# Allegro board 2019-08-20.brd
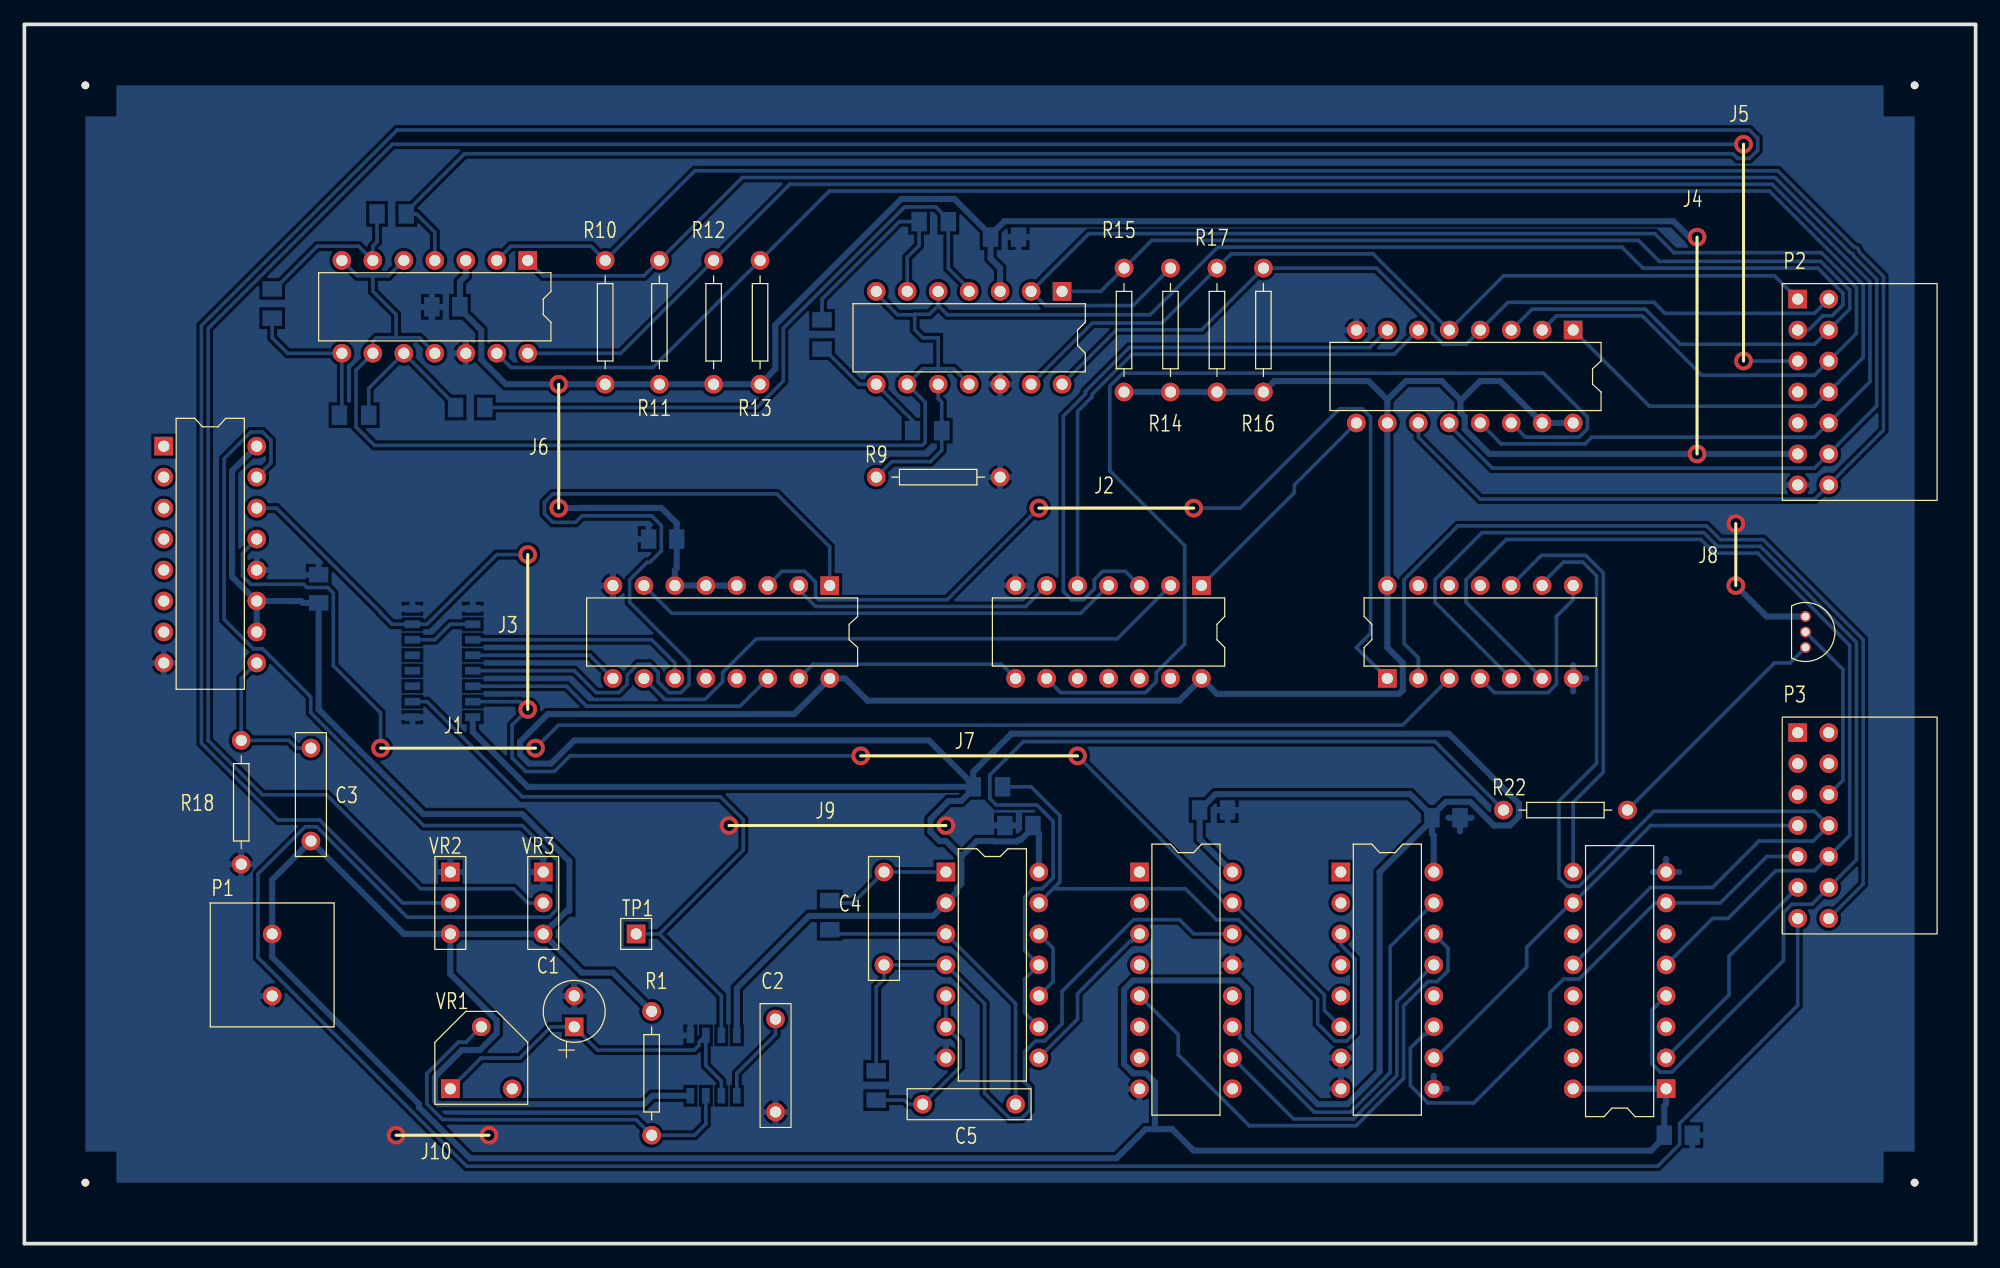
[diagram p0: board, top side]
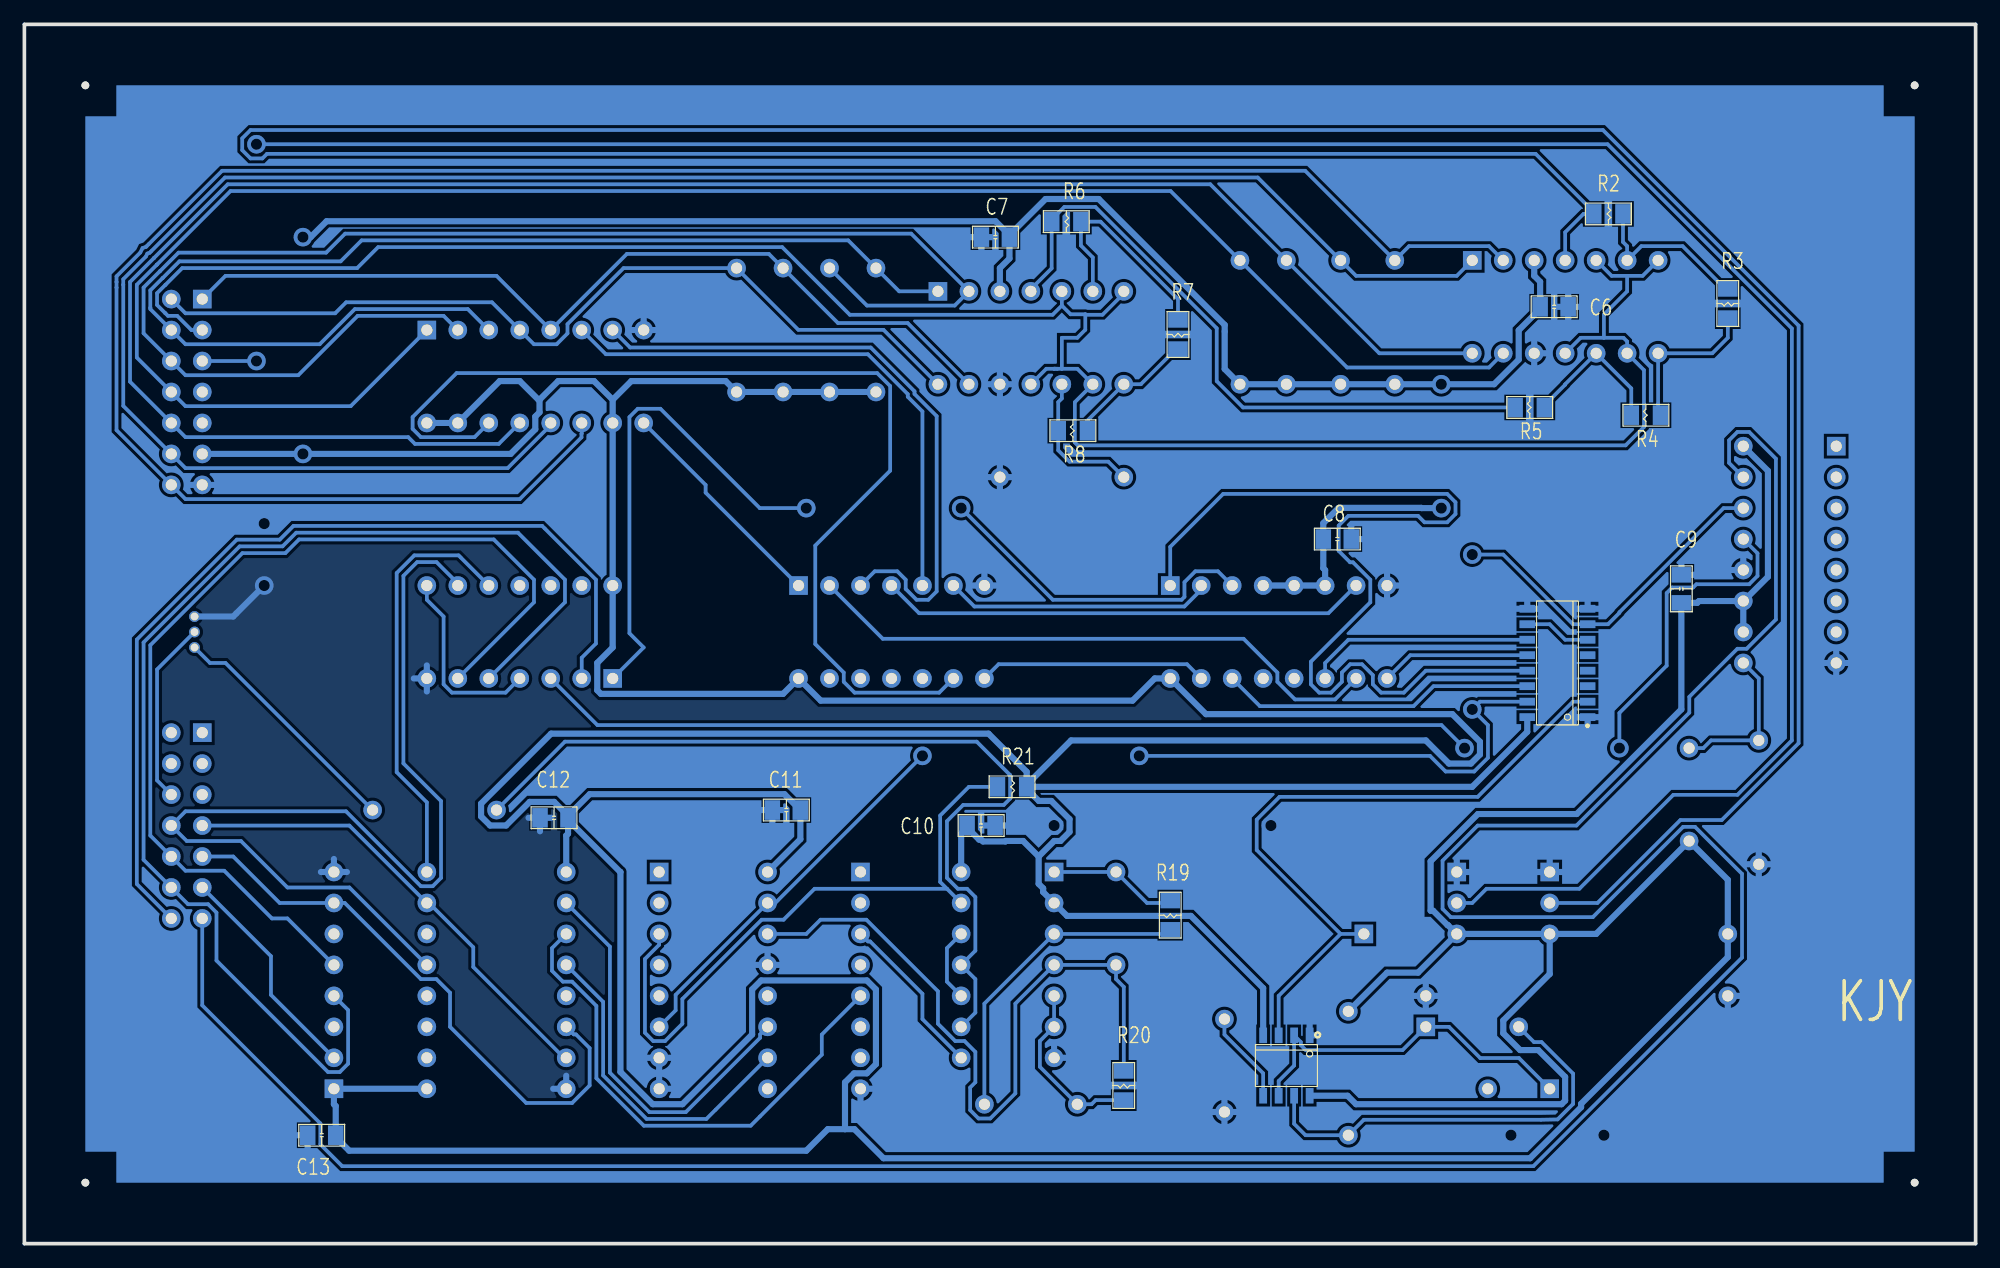
[diagram p1: board, bottom side, seen from below]

Outline 160 x 100 mm; copper layers: TOP, BOTTOM. Coordinates in mm from the lower left corner of the outline.
Outline path: 0,100 0,0 160,0 160,100 0,100

## Design rules (mm)
nets with their own width: min track width 0.3; nets MOTOR-GND
nets with their own width: min track width 0.5; nets +5V GND

## Placement (name value [footprint] x y rotation side)
C1  10uF  [CAP196]  45.09 17.78 0 top
C2  0.1uF  [CAP300]  61.59 18.41 270 top
C3  0.1uF  [CAP300]  23.5 33.02 90 top
C4  0.1uF  [CAP300]  70.48 30.48 270 top
C5  0.1uF  [CAP300]  81.28 11.43 180 top
C6  0.1uF  [SMDCAP]  35.56 76.83 180 bottom
C7  0.1uF  [SMDCAP]  79.38 82.55 0 bottom
C8  0.1uF  [SMDCAP]  53.34 57.78 180 bottom
C9  0.1uF  [SMDCAP]  24.13 52.7 90 bottom
C10  0.1uF  [SMDCAP]  82.55 34.29 180 bottom
C11  0.1uF  [SMDCAP]  96.52 35.56 0 bottom
C12  0.1uF  [SMDCAP]  115.57 34.92 0 bottom
C13  0.1uF  [SMDCAP]  134.62 8.89 0 bottom
J1  -  [44]  41.91 40.64 0 bottom
J2  -  [44]  95.89 60.33 0 bottom
J3  -  [44]  41.27 43.81 270 bottom
J4  -  [66]  137.16 64.77 270 bottom
J5  -  [66]  140.97 72.39 270 bottom
J6  -  [33]  43.81 70.48 90 bottom
J7  -  [66]  86.36 40.01 0 bottom
J8  -  [11]  140.34 53.98 270 bottom
J9  -  [66]  75.56 34.29 0 bottom
J10  -  [22]  30.48 8.89 180 bottom
NOREF  -  [unnamed]  155 5 0 top
NOREF#2  -  [unnamed]  5 5 0 top
NOREF#3  -  [unnamed]  5 95 0 top
NOREF#4  -  [#2]  0 0 0 top
NOREF#5  -  [#2]  0 0 90 top
NOREF#6  -  [unnamed]  155 95 0 top
P1  CON2  [2P]  20.32 25.4 0 top
P2  CON14  [JUMPER14]  145.41 77.47 270 top
P3  CON14  [JUMPER14]  145.41 41.91 270 top
Q1  2SC1815  [TO92]  146.05 51.44 0 top
R1  10K  [RES400]  51.44 19.05 270 top
R2  10K  [SMDR]  31.11 84.45 180 bottom
R3  10K  [SMDR]  20.32 78.11 270 bottom
R4  10K  [SMDR]  26.04 67.94 0 bottom
R5  10K  [SMDR]  35.56 68.58 0 bottom
R6  10K  [SMDR]  75.56 83.82 180 bottom
R7  10K  [SMDR]  65.41 75.56 270 bottom
R8  10K  [SMDR]  73.03 66.67 0 bottom
R9  10K  [RES400]  69.85 62.87 0 top
R10  10K  [RES400]  47.62 70.48 90 top
R11  10K  [RES400]  52.07 70.48 90 top
R12  10K  [RES400]  56.52 70.48 90 top
R13  10K  [RES400]  60.33 70.48 90 top
R14  10K  [RES400]  93.98 69.85 90 top
R15  10K  [RES400]  90.17 69.85 90 top
R16  10K  [RES400]  101.6 69.85 90 top
R17  10K  [RES400]  97.79 69.85 90 top
R18  10K  [RES400]  17.78 41.27 270 top
R19  10K  [SMDR]  66.04 27.94 270 bottom
R20  10K  [SMDR]  69.85 13.97 270 bottom
R21  10K  [SMDR]  80.01 37.47 180 bottom
R22  10K  [RES400]  121.28 35.56 0 top
TP1  TP  [JUMPER1]  50.16 25.4 0 top
U1  NE555  [SOIC8]  56.52 14.61 270 bottom
U2  LM339  [DIP14_3]  41.27 80.64 270 top
U3  LM339  [DIP14_3]  85.09 78.11 270 top
U4  40147  [DIP16_3]  127 74.93 270 top
U5  4069  [DIP14_3]  96.52 53.98 270 top
U6  4518  [SOIC16]  34.29 47.62 0 bottom
U7  4585  [DIP16_3]  66.04 53.98 270 top
U8  4027  [DIP16_3]  11.43 65.41 0 top
U9  4071  [DIP14_3]  111.76 46.35 90 top
U10  4001  [DIP14_3]  75.56 30.48 0 top
U11  4017  [DIP16_3]  91.44 30.48 0 top
U12  4051  [DIP16_3]  107.95 30.48 0 top
U13  4175  [DIP16_3]  134.62 12.7 180 top
VR1  1M  [VR1]  34.92 12.7 0 top
VR2  10K  [VR2]  34.92 27.94 0 top
VR3  10K  [VR2]  42.55 27.94 0 top

## Library data of the parts
C1 = Cap POL
C2-C5 = Cap NP
C6-C13 = Cap TEXT
J1-J10 = JUMPER
P1 = CON2
P2 P3 = CON14
Q1 = 2SC1815
R1-R22 = resistor
TP1 = TP
U1 = NE555: Tolerance: ***; User Part Number: ***
U2 U3 = LM339: Tolerance: ***; User Part Number: ***
U4 = 40147: Tolerance: ***; User Part Number: ***
U5 = 4069: Tolerance: ***; User Part Number: ***
U6 = 4518: Tolerance: ***; User Part Number: ***
U7 = 4585: Tolerance: ***; User Part Number: ***
U8 = 4027: Tolerance: ***; User Part Number: ***
U9 = 4071: Tolerance: ***; User Part Number: ***
U10 = 4001: Tolerance: ***; User Part Number: ***
U11 = 4017: Tolerance: ***; User Part Number: ***
U12 = 4051: Tolerance: ***; User Part Number: ***
U13 = 4175: Tolerance: ***; User Part Number: ***
VR1 = VR1
VR2 VR3 = VR2

## Footprints (pads in the part's own frame, mm; a bottom-side part is the same pattern mirrored in y, then rotated)
2P
  round 1.524 hole 0.914: 1(0,0) 2(0,-5.08)
CAP196
  rect 1.524x1.524 hole 0.914: 1(0,0)
  round 1.524 hole 0.914: 2(0,2.54)
CAP300
  round 1.524 hole 0.914: 1(0,0) 2(7.62,0)
DIP14_3
  rect 1.524x1.524 hole 0.914: 1(0,0)
  round 1.524 hole 0.914: 2(0,-2.54) 3(0,-5.08) 4(0,-7.62) 5(0,-10.16) 6(0,-12.7) 7(0,-15.24) 8(7.62,-15.24) 9(7.62,-12.7) 10(7.62,-10.16) 11(7.62,-7.62) 12(7.62,-5.08) 13(7.62,-2.54) 14(7.62,0)
DIP16_3
  rect 1.524x1.524 hole 0.914: 1(0,0)
  round 1.524 hole 0.914: 2(0,-2.54) 3(0,-5.08) 4(0,-7.62) 5(0,-10.16) 6(0,-12.7) 7(0,-15.24) 8(0,-17.78) 9(7.62,-17.78) 10(7.62,-15.24) 11(7.62,-12.7) 12(7.62,-10.16) 13(7.62,-7.62) 14(7.62,-5.08) 15(7.62,-2.54) 16(7.62,0)
JUMPER1
  rect 1.524x1.524 hole 0.914: 1(0,0)
JUMPER14
  rect 1.524x1.524 hole 0.914: 1(0,0)
  round 1.524 hole 0.914: 2(0,2.54) 3(2.54,0) 4(2.54,2.54) 5(5.08,0) 6(5.08,2.54) 7(7.62,0) 8(7.62,2.54) 9(10.16,0) 10(10.16,2.54) 11(12.7,0) 12(12.7,2.54) 13(15.24,0) 14(15.24,2.54)
RES400
  round 1.524 hole 0.914: 1(0,0) 2(10.16,0)
SMDCAP
  rect 1.27x1.6 smd: 1(-0.15,0) 2(2.15,0)
SMDR
  rect 1.27x1.6 smd: 1(-0.2,0) 2(2.2,0)
SOIC8
  rect 1.27x0.635 smd: 1(-2.476,1.905) 2(-2.476,0.635) 3(-2.476,-0.635) 4(-2.476,-1.905) 5(2.476,-1.905) 6(2.476,-0.635) 7(2.476,0.635) 8(2.476,1.905)
SOIC16
  rect 1.27x0.635 smd: 1(-2.476,4.445) 2(-2.476,3.175) 3(-2.476,1.905) 4(-2.476,0.635) 5(-2.476,-0.635) 6(-2.476,-1.905) 7(-2.476,-3.175) 8(-2.476,-4.445) 9(2.476,-4.445) 10(2.476,-3.175) 11(2.476,-1.905) 12(2.476,-0.635) 13(2.476,0.635) 14(2.476,1.905) 15(2.476,3.175) 16(2.476,4.445)
TO92
  round 0.889 hole 0.635: 1(0,0) 2(0,-1.27) 3(0,-2.54)
unnamed
  round 0.635 hole 3.175 unplated: (0,0)
VR1
  rect 1.524x1.524 hole 0.914: 1(0,0)
  round 1.524 hole 0.914: 2(2.54,5.08) 3(5.08,0)
VR2
  round 1.524 hole 0.914: 1(0,-2.54) 2(0,0)
  rect 1.524x1.524 hole 0.914: 3(0,2.54)

## Nets
+5V: C3.1 C6.1 C7.1 C8.1 C9.1 C10.1 C11.1 C12.1 C13.1 P1.1 P2.11 R1.1 R10.1 R11.1 R12.1 R13.1 R14.1 R15.1 R16.1 R17.1 R21.2 U1.4(RST) U1.8(VCC) U2.3 U3.3 U4.10(I\9\) U4.15(I\0\) U4.16(VCC) U5.14 U6.16 U7.4(A>BIN) U7.5(A<BIN) U7.6(A=BIN) U7.16(VCC) U8.10(J) U8.11(K) U8.16 U9.14 U10.2(I1) U10.14 U11.16(VCC) U12.16(VCC) U13.1(R\S\T\) U13.16(VCC) VR2.1(A) VR3.1(A)
GND: C1.2 C2.2 C6.2 C7.2 C8.2 C9.2 C10.2 C11.2 C12.2 C13.2 P1.2 P2.13 Q1.1(B) R9.2 R18.2 U1.1(GND) U2.12 U3.12 U4.8(GND) U5.7 U6.1(CLK) U6.8 U6.9(CLK) U7.8(GND) U8.8 U8.12(RST) U9.7 U10.7 U11.8(GND) U11.13(C\K\E\N\) U12.7(VEE) U12.8(GND) U12.9(C) U13.8(GND) VR2.3(WIPER) VR3.3(WIPER)
ADC0: P2.14 R10.2 U2.2(OUT) U4.11(I\1\)
ADC1: P2.12 R11.2 U2.1(OUT) U4.12(I\2\)
ADC2: P2.10 R12.2 U2.14(OUT) U4.13(I\3\)
ADC3: P2.8 R13.2 U2.13(OUT) U4.1(I\4\)
ADC4: P2.6 R14.2 U3.2(OUT) U4.2(I\5\)
ADC5: P2.4 R15.2 U3.1(OUT) U4.3(I\6\)
ADC6: P2.2 R16.2 U3.14(OUT) U4.4(I\7\)
ADC7: P2.1 R17.2 U3.13(OUT) U4.5(I\8\)
CLK: TP1.1 U1.3(OUT) U6.2(EN)
MOTOR-GND: P3.6 Q1.2(C)
MR: U6.7(CLR) U6.15(CLR) U8.14(Q\) U11.15(RST) U12.6(E\N\)
MR2: P3.13 U8.15(Q)
SW1: P3.14 U9.2(I1)
SW2: P3.12 U9.5(I0) U13.4(D0)
SW3: P3.10 U9.6(I1) U13.5(D1)
SW4: P3.8 U9.9(I1) U13.12(D2)
SWLED1: P3.11 U13.2(Q0)
SWLED2: P3.9 U12.11(A) U13.7(Q1)
SWLED3: P3.7 U12.10(B) U13.10(Q2)
VR3: P2.5 VR3.2(B)
VR-LED: P2.3 U2.5(+IN) U2.7(+IN) U2.9(+IN) U2.11(+IN) U3.5(+IN) U3.7(+IN) U3.9(+IN) U3.11(+IN)
N00183: R2.1 U2.4(-IN) VR2.2(B)
N00203: R2.2 R3.1 U2.6(-IN)
N00569: R3.2 R4.1 U2.8(-IN)
N00644: R4.2 R5.1 U2.10(-IN)
N00726: R5.2 R6.1 U3.4(-IN)
N00801: R6.2 R7.1 U3.6(-IN)
N00876: R7.2 R8.1 U3.8(-IN)
N00951: R8.2 R9.1 U3.10(-IN)
N03223: U4.9(A\) U5.1(I)
N03253: U4.7(B\) U5.3(I)
N03265: U4.6(C\) U5.5(I)
N03278: U4.14(D\) U5.9(I)
N03294: U5.2(O) U7.10(A0)
N03330: U5.4(O) U7.7(A1)
N03646: U5.6(O) U7.2(A2)
N03660: U5.8(O) U7.15(A3)
N03717: U6.11(Q0) U7.11(B0)
N03719: U6.12(Q1) U7.9(B1)
N03721: U6.13(Q2) U7.1(B2)
N03723: U6.14(Q3) U7.14(B3)
N03908: U6.6(Q3) U6.10(EN)
N04070: U7.3(A=BOUT) U9.1(I0)
N04109: U8.13(CLK) U9.3(O)
N04217: C1.1 U1.2(TRIG) U1.6(THR) VR1.1
N04252: R1.2 U1.7(DISC) VR1.2
N04333: C2.1 U1.5(CV)
N04384: C3.2 R18.1 U8.9(SET)
N08382: C5.1 R19.2 U10.3(O)
N08397: C5.2 R20.2 U10.5(I0) U10.6(I1)
N08458: C4.2 R20.1 U10.4(O) U11.14(CLK)
N08462: C4.1 R19.1 U10.1(I0)
N09234: U10.8(I0) U11.3(0)
N09252: U11.10(4) U12.13(X0)
N09264: U11.5(6) U12.14(X1)
N09282: U11.11(9) U12.15(X2)
N09536: U9.4(O) U9.8(I0)
N09552: U9.10(O) U13.9(CLK)
N09939: Q1.3(E) R22.2
N09960: R22.1 U10.9(I1) U10.11(O)
N09972: U10.10(O) U10.12(I0)
N10089: R21.1 U10.13(I1) U12.3(X)

Pads without a net: P2 7 9; P3 1 2 3 4 5; U5 10 11 12 13; U6 3 4 5; U7 12 13; U8 1 2 3 4 5 6 7; U9 11 12 13; U11 1 2 4 6 7 9 12; U12 1 2 4 5 12; U13 3 6 11 13 14 15; VR1 3

## Via types
v1: diameter 1.524, hole 0.914, TOP to BOTTOM, 20 vias

## Routing (per net, layer and track width the routed paths; a pad name or vN(x,y) marks a point on that pad's centre or on a via; arc(x,y) is an arc through that point)
+5V: length 889.3
  BOTTOM w0.5: U4.16 U4.15 121.02,70.75 119.38,70.75 117.85,69.22 117.76,69.22 ; 111.76,69.22 110.23,70.75 102.5,70.75 R16.1 R17.1 R14.1 R15.1 ; 111.76,69.22 U4.10 111.76,48.9 113.03,47.63 113.03,45.38 112.73,45.09 97.79,45.09 U5.14 94.7,44.53 69.13,44.53 67.31,46.35 U7.16 63.11,43.43 42.91,43.43 40.64,41.16 40.64,40.12 41.38,39.37 43.18,39.37 45.08,41.27 74.17,41.27 77.81,37.63 ; 111.76,69.22 113.29,70.75 116.23,70.75 117.76,69.22 ; 92.71,9.39 94.12,9.39 95.89,7.62 133.37,7.62 134.47,8.72 C13.1 134.47,11.28 134.62,11.43 U13.1 U13.16 ; 92.71,9.39 91.94,9.39 89.55,7 36.53,7 32.35,11.19 32.35,11.46 20.32,23.5 P1.1 20.32,29.84 C3.1 31.11,25.4 VR2.1 ; 92.71,9.39 92.71,13.22 91.97,13.97 90.92,13.97 90.17,14.71 90.17,20.84 90.92,21.59 99.58,21.59 100.33,20.84 100.33,17.15 106.04,11.43 108.47,11.43 111.12,14.08 111.12,30.48 111.14,30.48 115.42,34.76 ; U8.16 17.03,63.38 17.03,54.69 19.02,52.7 U8.11 ; U8.11 22.68,52.7 22.83,52.55 C9.1 24.13,43.82 32.71,35.23 40.81,35.23 44.69,31.36 44.69,27.3 44.48,27.3 43.3,26.12 43.27,26.12 VR3.1 ; U8.11 U8.10 ; U12.16 115.57,33.47 115.42,33.62 115.42,34.76 ; VR2.1 VR3.1 ; VR2.1 34.92,22.11 38.73,18.3 38.73,17.25 37.35,15.88 35.86,15.88 33.66,13.67 33.66,11.73 33.95,11.43 50.8,11.43 51.5,12.13 54.61,12.13 ; VR3.1 45.72,22.23 48.26,22.23 R1.1 ; U1.4 58.42,20.95 64.34,26.88 74.5,26.88 U10.2 76.46,28.84 76.46,29.14 76.83,29.51 76.83,31.75 ; 77.81,37.63 77.81,38.7 80.94,41.83 116.81,41.83 122.55,36.09 122.55,35.03 121.81,34.29 120.5,34.29 118.56,36.23 116.56,36.23 115.42,35.09 ; 77.81,37.63 R21.2 ; 76.83,31.75 75.56,33.02 75.04,33.02 74.3,33.77 74.3,34.81 75.79,36.31 76.82,36.31 77.81,37.3 R21.2 ; 76.83,31.75 78.11,33.02 79.52,33.02 79.56,32.99 81.4,32.99 81.54,33.13 81.71,33.13 82.7,34.12 ; U10.14 83.19,33.64 82.7,34.12 ; 117.76,69.22 117.76,68.18 118.11,67.83 118.11,66.79 120.13,64.77 v1(137.16,64.77) P2.11 ; U3.3 80.01,80.01 79.22,80.8 C7.1 79.22,82.72 ; 82.7,34.12 C10.1 ; 79.22,82.72 80.36,83.85 135.22,83.85 136.53,82.55 v1(137.16,82.55) ; 79.22,82.72 76.26,85.68 71.9,85.68 61.58,75.35 61.58,74.81 61.58,71.74 R13.1 R12.1 R11.1 R10.1 v1(43.81,70.48) 39.48,70.48 37.47,72.5 37.47,74.92 35.71,76.67 C6.1 35.71,78.89 36.2,79.38 U2.3 ; R21.2 41.27,37.47 36.77,41.97 U6.16 ; 115.42,34.76 C12.1 115.42,35.09 ; U7.4 U7.5 U7.6 53.34,55.24 53.49,55.39 C8.1 53.49,59.09 52.23,60.34 45.45,60.34 45.43,60.33 v1(43.81,60.33) ; 115.42,35.09 113.65,36.86 97.67,36.86 C11.1 96.37,33.17 U11.16
GND: length 109.7
  BOTTOM w0.5: 107.95,13.77 U12.8 106.88,12.7 ; 61.59,10.79 61.59,11.86 ; 61.59,10.79 62.66,10.79 ; 61.59,10.79 61.59,9.73 ; 61.59,10.79 60.53,10.79 ; v1(140.34,53.98) 142.88,51.44 Q1.1 ; 127,45.29 U9.7 ; U9.7 127,47.42 ; U9.7 128.07,46.35 ; U6.8 32.76,52.07 ; U6.8 31.81,52.7 ; U6.8 30.87,52.07 ; U7.8 48.26,55.04 ; U7.8 47.19,53.98 ; U7.8 48.26,52.91 ; 42.55,29.41 VR3.3 ; VR3.3 42.55,31.55 ; VR3.3 41.48,30.48 ; 137.71,8.89 C13.2 136.77,7.78 ; U2.12 36.2,74.09 ; U2.12 36.2,71.96 ; U2.12 35.13,73.03 ; 90.37,12.7 U11.8 91.44,11.63 ; 17.78,30.05 R18.2 ; R18.2 17.78,32.18 ; R18.2 16.71,31.11 ; R18.2 18.85,31.11 ; 44.02,20.32 C1.2 ; C1.2 45.09,21.39 ; C1.2 46.15,20.32 ; C1.2 45.09,19.25 ; 106.88,15.24 U12.7 ; U12.7 107.95,14.17 ; U12.7 109.02,15.24 ; U13.8 135.69,30.48 ; U13.8 134.62,31.55 ; U13.8 133.55,30.48 ; 54.61,18.02 U1.1 53.98,17.08 ; 81.53,81.44 C7.2 ; C7.2 82.47,82.55 ; C7.2 80.58,82.55 ; 78.94,70.48 U3.12 ; U3.12 81.08,70.48 ; U3.12 80.01,71.55 ; U3.12 80.01,69.42 ; C6.2 34.35,76.83 ; C6.2 33.41,77.94 ; C6.2 33.41,75.73 ; C6.2 32.47,76.83 ; 98.67,34.45 C11.2 ; C11.2 99.61,35.56 ; C11.2 97.73,35.56 ; 97.99,22.86 U11.13 ; U11.13 99.06,23.93 ; U11.13 100.13,22.86 ; 33.86,30.48 VR2.3 ; VR2.3 35.99,30.48 ; VR2.3 34.92,31.55 ; 146.48,62.23 P2.13 144.35,62.23 ; 23.02,54.85 C9.2 24.13,55.8 ; 11.43,46.56 U8.8 ; U8.8 11.43,48.69 ; U8.8 10.36,47.62 ; U8.8 12.5,47.62 ; 80.21,53.98 U5.7 ; U5.7 82.35,53.98 ; U5.7 81.28,55.04 ; 35.82,52.07 U6.9 ; U6.9 36.77,52.7 ; U6.9 37.71,52.07 ; U6.1 32.76,43.18 ; U6.1 30.87,43.18 ; U6.1 31.81,42.55 ; 74.5,15.24 U10.7 75.56,16.31 ; 117.72,33.82 C12.2 ; C12.2 116.78,34.92 ; C12.2 118.66,34.92 ; 80.01,61.8 R9.2 ; R9.2 81.08,62.87 ; R9.2 80.01,63.93 ; R9.2 78.94,62.87 ; 108.15,74.93 U4.8 ; U4.8 110.29,74.93 ; U4.8 109.22,76 ; 115.57,13.77 U12.9 116.64,12.7 ; 81.34,34.29 C10.2 79.46,34.29 ; 19.25,20.32 P1.2 20.32,19.25 ; 19.05,56.31 19.05,55.24 20.12,55.24 ; 50.25,57.78 C8.2 51.19,58.89
  vias: v1(30.48,8.89) v1(38.1,8.89) v1(57.78,34.29) v1(75.56,34.29) v1(140.34,59.05)
ADC0: length 177.7
  BOTTOM w0.3: U4.11 114.3,66.44 114.32,66.42 114.32,66.12 119.38,61.06 146.79,61.06 152.44,66.72 152.44,78.41 152.45,78.42 152.45,78.87 152.45,78.87 152.45,79.33 150.5,81.28 150.31,81.66 150.03,81.75 149.98,81.8 149.82,81.96 143.78,87.99 54.97,87.99 R10.2 46.46,81.81 39.9,81.81 U2.2
ADC1: length 167.2
  BOTTOM w0.3: U4.12 116.84,67.13 120.37,63.6 146.79,63.6 151.89,68.71 151.89,78.64 151.89,79.1 150.04,80.95 149.92,81.2 149.73,81.27 149.59,81.41 143.55,87.44 58.87,87.44 R11.2 50.8,79.38 42.55,79.38 U2.1
ADC2: length 162.1
  BOTTOM w0.3: U2.14 48.9,73.03 R12.2 62.76,86.89 143.32,86.89 149.36,80.85 151.34,78.87 151.34,70.69 146.79,66.14 128.52,66.14 127.97,65.59 121.1,65.59 U4.13
ADC3: length 155.7
  BOTTOM w0.3: U2.13 39.9,71.86 51.54,71.86 R13.2 66.01,86.33 143.09,86.33 149.13,80.3 149.13,80.3 150.78,78.64 150.78,72.68 146.79,68.68 133.25,68.68 U4.1
ADC4: length 118.1
  BOTTOM w0.3: R14.2 90.91,76.94 83.72,76.94 U3.2 87.28,82.84 133.7,82.84 135.25,81.28 147.36,81.28 148.89,79.74 148.9,79.74 150.23,78.41 150.23,74.66 146.79,71.22 137.54,71.22 132.67,76.1 125.63,76.1 U4.2
ADC5: length 100.4
  BOTTOM w0.3: U4.3 123.64,76.65 132.9,76.65 135.79,73.76 146.79,73.76 149.67,76.64 149.67,76.75 149.68,76.76 149.68,78.18 148.67,79.19 148.66,79.19 147.29,80.56 134.07,80.56 132.35,82.28 92.44,82.28 R15.2 88.27,78.11 U3.1
ADC6: length 72.1
  BOTTOM w0.3: U3.14 89.55,74.95 96.54,74.95 R16.2 110.87,80.01 115.47,75.41 115.47,74.66 116.36,73.76 118.21,73.76 U4.4 121.65,77.2 133.62,77.2 134.52,76.3 146.79,76.3 147.96,77.47
ADC7: length 72.5
  BOTTOM w0.3: U3.13 87.57,75.5 93.28,75.5 R17.2 98.96,81.18 110.59,81.18 U4.5 121.28,79.38 143.51,79.38 P2.1
CLK: length 55.7
  BOTTOM w0.3: U1.3 57.15,20.32 52.07,25.4 ; 52.07,25.4 58.95,32.28 58.95,34.77 57.08,36.64 40.83,36.64 33.02,44.45 U6.2 ; 52.07,25.4 TP1.1
MOTOR-GND: length 15.1
  BOTTOM w0.3: Q1.2 149.12,47.09 149.12,38 147.96,36.83
MR: length 99
  BOTTOM w0.3: U8.14 20.67,60.33 29.21,51.78 29.21,51.73 30.14,50.8 U6.7 33.02,50.8 38.73,56.52 v1(41.27,56.52) ; U12.6 106.6,19.13 106.6,20.4 U11.15 98.42,27.94 v1(86.36,40.01) ; U6.15 40.64,44.45 v1(41.27,43.81) 39.99,42.53 39.99,39.84 41.11,38.72 43.45,38.72 44.74,40.01 v1(68.58,40.01)
MR2: length 245.3
  BOTTOM w0.3: P3.13 145.41,19.54 135.73,9.86 135.73,8.14 133.94,6.35 36.26,6.35 19.15,23.46 19.15,30.33 23.01,34.19 23.98,34.19 31.39,26.77 43.03,26.77 43.71,27.46 43.71,31.41 40.83,34.29 32.73,34.29 23.48,43.55 23.48,44.85 19.53,48.79 18.77,48.79 16.38,51.19 16.38,64.38 18.57,66.57 19.53,66.57 20.22,65.89 20.22,64.03 U8.15
SW1: length 76
  BOTTOM w0.3: 147.96,26.67 150.78,29.5 150.78,49.54 142.58,57.74 139.06,57.74 137.94,58.87 117.54,58.87 117.33,58.65 113.13,54.46 113.13,49.22 114.3,48.05 U9.2
SW2: length 101
  BOTTOM w0.3: U9.5 115.67,52.6 115.67,54.46 119.53,58.31 137.71,58.31 138.83,57.19 142.35,57.19 150.23,49.31 150.23,31.48 146.58,27.84 144.93,27.84 144.25,27.15 144.25,23.22 135.1,14.07 134.14,14.07 133.45,14.76 133.45,19.15 U13.4
SW3: length 82.2
  BOTTOM w0.3: U9.6 118.21,52.6 118.21,54.46 121.51,57.76 137.48,57.76 138.6,56.63 142.12,56.63 149.68,49.08 149.68,33.47 146.79,30.58 143.61,30.58 139.7,26.67 138.43,26.67 U13.5
SW4: length 83
  BOTTOM w0.3: U13.12 133.35,29.21 138.43,29.21 142.24,33.02 146.69,33.02 147.96,34.29 146.79,35.46 133.63,35.46 127.48,29.31 126.52,29.31 125.83,30 125.83,36.3 128.92,39.38 128.92,54.77 127.8,55.9 126.2,55.9 124.46,54.15 124.46,53.98
SWLED1: length 18.4
  BOTTOM w0.3: P3.11 139.78,23.58 139.78,20.4 U13.2
SWLED2: length 48.1
  BOTTOM w0.3: P3.9 142.88,31.75 139.06,27.94 U13.7 133.73,27.94 127.48,21.69 126.21,21.69 125.09,20.58 125.09,17.78 118.85,11.53 115.09,11.53 113.65,12.97 113.65,16.04 114.77,17.16 114.95,17.16 U12.11
SWLED3: length 38.7
  BOTTOM w0.3: P3.7 133.35,34.29 U13.10 126.82,27.94 123.19,24.31 123.19,22.68 115.75,15.24 U12.10
VR3: length 203.4
  BOTTOM w0.3: P2.5 v1(140.97,72.39) ; VR3.2 41.27,27.94 40.11,29.11 32.49,29.11 24.78,36.81 19.53,36.81 15.07,41.27 15.07,75.06 30.18,90.17 v1(140.97,90.17)
VR-LED: length 181.8
  BOTTOM w0.3: 74.93,76.94 75.68,76.19 92.31,76.19 97.86,81.73 131,81.73 132.72,80.01 147.06,80.01 148.43,78.64 148.44,78.64 149.12,77.95 149.12,76.99 148.44,76.3 148.44,76.3 148.23,76.1 147.47,76.1 146.31,74.93 P2.3 ; 74.93,76.94 U3.5 ; 74.93,76.94 74.21,76.22 73,76.22 ; 75.31,71.75 74.93,71.75 ; 75.31,71.75 75.56,71.75 ; 75.31,71.75 75.56,71.76 75.56,71.75 ; 74.93,71.75 73.66,71.75 U3.9 73.86,69.01 73.86,65.71 73.63,65.47 28.7,65.47 27.2,66.98 27.2,71.65 U2.9 28.57,74 28.88,74.3 30.48,74.3 ; 74.93,71.75 74.93,74.3 73.66,74.3 73,74.95 73,76.22 ; 28.57,79.38 29.84,79.38 U2.5 ; 28.57,79.38 28.57,78.11 30.48,76.2 30.48,74.3 ; 28.57,79.38 27.3,79.38 26.04,80.64 ; 73,76.22 72.97,76.19 71.59,76.19 69.85,77.93 U3.7 ; U3.11 76.2,71.75 75.56,71.75 ; U2.11 32.38,74.3 30.48,74.3
N00183: length 314.5
  BOTTOM w0.3: VR2.2 31.01,27.94 24.21,34.74 20.82,34.74 14.51,41.04 14.51,75.29 30.56,91.34 141.45,91.34 142.14,90.65 142.14,89.69 141.45,89 140.49,89 140.11,89.38 36.08,89.38 31.32,84.62 31.32,84.45 ; 31.32,84.45 31.11,84.45 ; 31.32,84.45 32.15,84.45 33.66,82.95 U2.4
N00203: length 14.4
  BOTTOM w0.3: R2.2 28.91,82.15 28.57,81.81 U2.6 27.41,81.81 24.03,81.81 20.52,78.31 ; R3.1 20.52,78.31 ; 20.52,78.31 20.32,78.11
N00569: length 13.3
  BOTTOM w0.3: 20.32,76.11 R3.2 20.32,74.3 21.59,73.03 26.04,73.03 26.04,67.94 R4.1
N00644: length 12.7
  BOTTOM w0.3: 28.04,67.94 R4.2 28.23,70.14 U2.10 33.66,70.48 33.66,70.45 35.36,68.75 R5.1
N00726: length 54.4
  BOTTOM w0.3: R5.2 60.07,68.58 62.23,70.74 62.23,75.08 72.17,85.02 74.73,85.02 75.77,83.98 R6.1 75.77,79.99 77.47,78.28 U3.4
N00801: length 18.6
  BOTTOM w0.3: 65.41,75.56 R7.1 65.41,77.47 71.75,83.82 R6.2 73.36,81.86 72.39,80.89 U3.6
N00876: length 10.7
  BOTTOM w0.3: R8.1 72.83,67.51 U3.8 68.45,70.48 65.57,73.36 R7.2
N00951: length 11.8
  BOTTOM w0.3: U3.10 74.93,69.32 75.22,69.02 75.22,65.06 74.3,64.14 71.12,64.14 R9.1
N03223: length 18.6
  BOTTOM w0.3: U5.1 104.14,61.59 104.14,62.23 U4.9
N03253: length 52.4
  BOTTOM w0.3: U4.7 110.33,73.5 90.6,73.5 87.01,69.91 87.01,69.69 85.19,67.87 85.19,53.49 85.88,52.81 86.84,52.81 87.73,53.7 87.73,54.46 88.42,55.14 90.27,55.14 U5.3
N03265: length 45.1
  BOTTOM w0.3: U5.5 86.36,68.25 87.56,69.46 87.56,69.68 90.83,72.94 112.31,72.94 U4.6
N03278: length 86.7
  BOTTOM w0.3: U5.9 84.99,45.19 91.92,45.19 92.81,46.08 92.81,46.84 95.15,49.17 95.15,57.25 89,63.4 89,70.33 90.07,71.4 124.56,71.4 128.17,67.79 128.17,66.83 127.48,66.14 123.09,66.14 U4.14
N03294: length 48.2
  BOTTOM w0.3: U5.2 89.61,49.61 60.03,49.61 57.25,46.84 57.25,46.08 55.81,44.63 52.52,44.63 U7.10
N03330: length 40
  BOTTOM w0.3: U5.4 86.63,51.7 53.07,51.7 U7.7
N03646: length 21.9
  BOTTOM w0.3: U7.2 63.5,53.63 64.88,52.26 82.1,52.26 U5.6
N03660: length 18.7
  BOTTOM w0.3: U7.15 64.67,47.52 80.11,47.52 U5.8
N03717: length 18.6
  BOTTOM w0.3: U7.11 53.34,47.62 51.44,49.53 U6.11
N03719: length 12.3
  BOTTOM w0.3: U7.9 46.35,48.26 U6.12
N03721: length 77.9
  BOTTOM w0.3: U6.13 45.09,46.99 46.89,45.19 48.74,45.19 49.43,45.87 49.43,46.63 50.32,47.52 51.28,47.52 51.97,46.84 51.97,46.08 52.86,45.19 53.82,45.19 54.51,45.87 54.51,47.73 49.63,52.6 49.63,54.46 51.06,55.88 51.29,55.88 52.23,56.82 52.23,58.9 51.44,59.69 45.72,59.69 45.19,59.16 43.33,59.16 42.65,59.84 42.65,60.81 43.33,61.49 61.7,61.49 66.04,57.15 U7.1
N03723: length 25.8
  BOTTOM w0.3: U6.14 44.45,45.72 46.09,44.08 58.69,44.08 U7.14
N03908: length 5.5
  BOTTOM w0.3: U6.10 34.92,50.8 33.66,49.53 U6.6
N04070: length 68.6
  BOTTOM w0.3: U7.3 62.13,55.14 63.98,55.14 64.87,54.25 64.87,53.05 65.11,52.81 75.67,52.81 v1(83.19,60.33) ; U9.1 109.22,48.9 110.39,50.06 110.39,67.79 109.7,68.48 107.85,68.48 99.69,60.33 v1(95.89,60.33)
N04109: length 103.2
  BOTTOM w0.3: v1(29.21,40.64) 29.21,43.52 25.33,47.4 25.33,53.36 24.88,53.82 23.16,53.82 22.9,54.08 18.57,54.08 17.88,54.76 17.88,56.62 19.05,57.78 ; v1(41.91,40.64) 43.8,42.53 113.01,42.53 U9.3
N04217: length 30
  BOTTOM w0.3: 57.15,12.13 57.15,13.34 55.88,14.61 U1.2 55.33,16.53 55.33,16.28 54.93,15.88 46.99,15.88 C1.1 43.18,17.78 40.62,15.22 37.45,15.22 VR1.1
N04252: length 35.2
  BOTTOM w0.3: 55.88,12.13 55.88,9.82 54.95,8.89 R1.2 50.16,10.16 35.63,10.16 34.28,10.19 33.01,11.46 33.01,13.94 35.59,16.53 36.21,16.53 VR1.2
N04333: length 7.6
  BOTTOM w0.3: 58.42,12.13 58.42,13.97 61.59,17.14 C2.1
N04384: length 12.9
  BOTTOM w0.3: U8.9 17.78,46.35 R18.1 21.69,41.27 22.33,40.64 C3.2
N08382: length 26.3
  BOTTOM w0.3: R19.2 66.04,25.94 66.58,25.4 U10.3 81.28,19.68 C5.1
N08397: length 14.6
  BOTTOM w0.3: R20.2 72.15,11.77 72.49,11.43 C5.2 76.73,14.5 76.73,16.61 U10.6 U10.5
N08458: length 59.3
  BOTTOM w0.3: R20.1 69.85,21.06 70.48,21.69 C4.2 U10.4 78.74,19.68 78.74,12.32 80.8,10.26 81.76,10.26 82.45,10.95 82.45,12.8 82.02,13.23 82.02,15.72 82.91,16.61 83.67,16.61 85.09,18.04 85.09,20.7 90.96,26.57 94.72,26.57 95.89,25.4 U11.14
N08462: length 10.7
  BOTTOM w0.3: R19.1 66.24,27.94 67.94,27.94 C4.1 U10.1
N09234: length 13.7
  BOTTOM w0.3: U11.3 90.82,24.78 90.65,24.78 86.36,20.5 86.36,18.41 U10.8
N09252: length 27.4
  BOTTOM w0.3: U12.13 112.54,19.83 112.54,13.79 108.98,10.23 104.08,10.23 103.32,10.98 U11.10
N09264: length 42.9
  BOTTOM w0.3: U11.5 94.61,17.14 94.61,15.5 99.69,10.43 100.44,9.67 109.21,9.67 113.1,13.56 113.1,19.5 115.09,21.49 115.84,21.49 116.74,22.38 116.74,24.23 U12.14
N09282: length 32.7
  BOTTOM w0.3: U12.15 111.99,24.36 111.99,14.02 108.75,10.78 105.77,10.78 99.67,16.88 99.67,17.17 U11.11
N09536: length 15.7
  BOTTOM w0.3: 127,53.98 127,52.81 125.63,51.44 125.63,45.87 124.94,45.19 120.55,45.19 U9.4
N09552: length 34.7
  BOTTOM w0.3: 121.92,53.98 124.23,56.28 124.39,56.45 128.03,56.45 129.47,55 129.47,38.67 127,36.2 U13.9
N09939: length 20.1
  BOTTOM w0.3: R22.2 143.51,47.62 144.78,47.62 Q1.3
N09960: length 73.2
  BOTTOM w0.3: R22.1 115.67,41.17 81.91,41.17 79.17,38.43 79.17,36.5 79.69,35.98 83.02,35.98 84.35,34.65 84.35,30 83.46,29.11 82.7,29.11 82.02,28.42 82.02,24.03 U10.11 82.02,21.69 82.02,18.95 U10.9
N09972: length 6
  BOTTOM w0.3: U10.12 84.35,24.23 84.35,21.49 U10.10
N10089: length 53.5
  BOTTOM w0.3: U12.3 107.95,24.51 109.12,23.34 109.12,17.3 108.43,16.61 107.47,16.61 106.05,18.04 106.05,20.06 99.54,26.57 97.75,26.57 95.2,29.11 84.35,29.11 ; R21.1 82.55,37.47 84.91,35.11 84.91,29.66 84.35,29.11 ; 84.35,29.11 U10.13

## Copper pours and planes (outline as drawn; the poured copper is in the pictures)
GND on BOTTOM (solid shape): 78.77,36.33 79.52,35.57 82.85,35.57 82.9,35.52 82.93,35.41 82.83,35.35 81.81,35.35 81.81,33.95 81.5,33.64 81.29,33.64 81.29,35.35 79.51,35.35 79.51,33.53 77.89,33.53 76.83,32.47 75.77,33.53 75.25,33.53 74.81,33.98 74.81,34.6 76,35.8 77.03,35.8 77.64,36.41 78.77,36.41
GND on BOTTOM (solid shape): 151.87,68.11 151.98,68.13 152.04,68.03 152.04,66.89 148.33,63.18 148.3,63.19 147.24,62.95 147,61.89 147.01,61.86 146.62,61.47 146.32,61.47 146.23,61.53 146.24,61.63 146.42,62.36 146.06,63.02 146.03,63.13 146.12,63.2 146.96,63.2 147.58,63.82 148.66,64.04 148.91,65.11 148.9,65.14
GND on BOTTOM (solid shape): outline of 2529 points within 5,5 155,95
GND on BOTTOM (solid shape): outline of 3963 points within 15.47,7.51 120.34,81.41
(no net) on BOTTOM: 5,5 5,95 155,95 155,5 ; 101 cut-outs

## Text on the board
Ref Des/Silkscreen Bottom: KJY
DIMENSION: FIGURE | SIZE | 0.635 | 0.914 | 3.175 | DRILL CHART: TOP to BOTTOM | ALL UNITS ARE IN MILLIMETERS | PLATED | NON-PLATED | QTY | 3 | 260 | 4
